# Altium PCB IRLED Board.PcbDoc
Units mil, origin at the board's own origin, x right, y up, seen from the top; angles counter-clockwise.
Board outline 433.07 x 629.92 mil, 2 copper layers (Top Layer, Bottom Layer); 8 components, 4 nets, 19 pads, 3 vias.
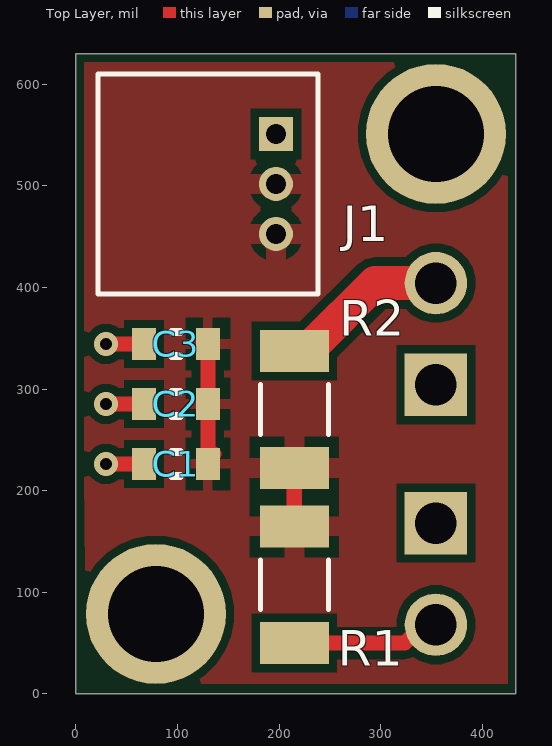
[diagram p0: Top Layer view]
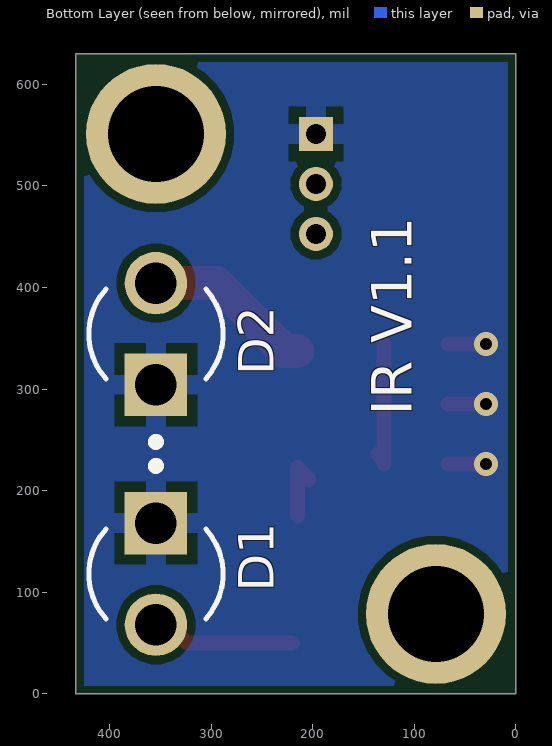
[diagram p1: Bottom Layer view, seen from below]
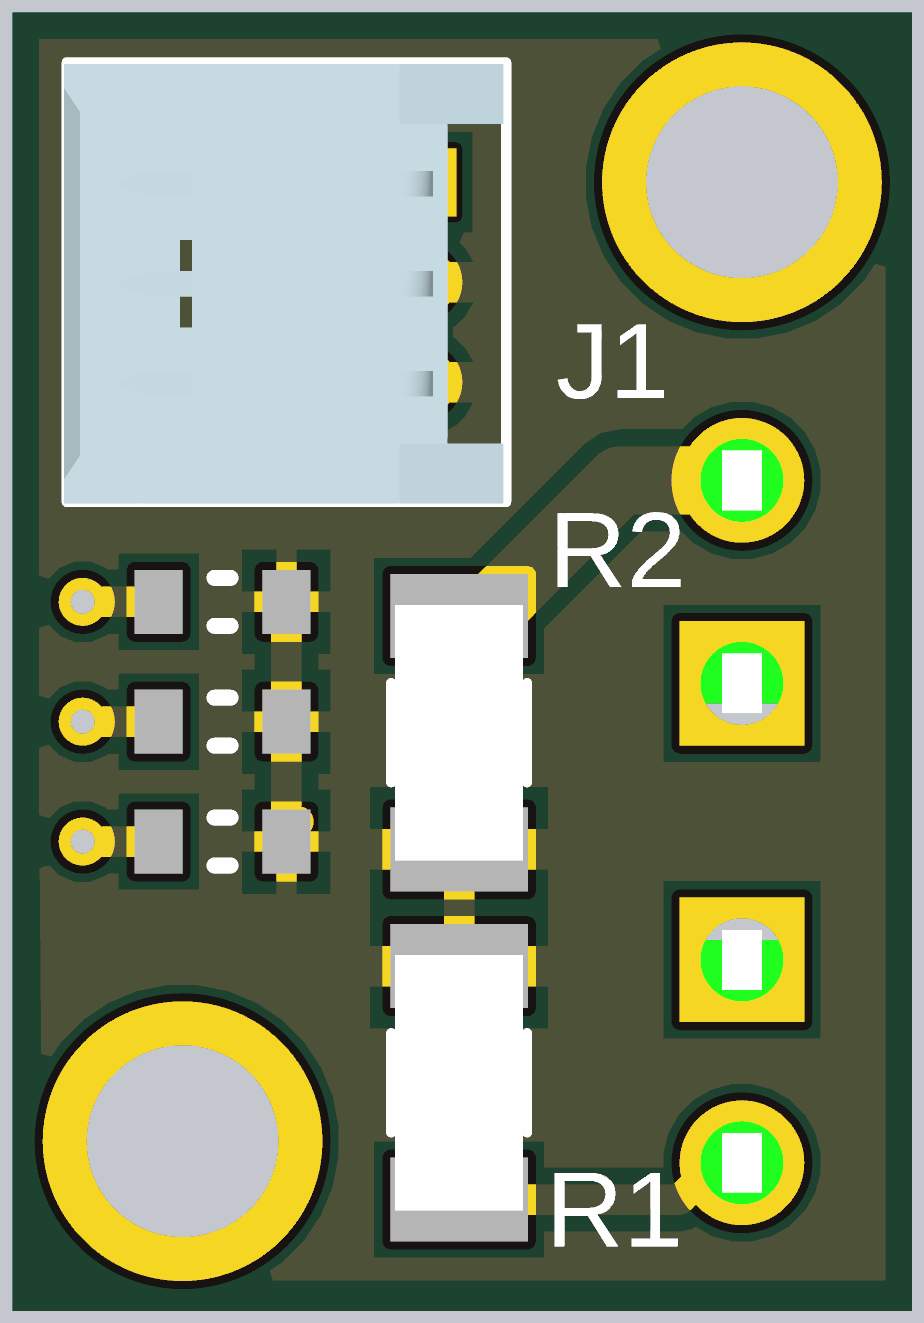
[diagram p2: 3D render of the assembled board from above, using the file's embedded part models]

## Layer stack, top to bottom
Top Solder: solder mask 0.4, Solder Resist, Dk 3.5
Top Layer: signal copper 1.4
Dielectric 1: dielectric 12.6, FR-4, Dk 4.8
Bottom Layer: signal copper 1.4
Bottom Solder: solder mask 0.4, Solder Resist, Dk 3.5

## Board outline
0,0 433.07,0 433.07,629.92 0,629.92

## Design rules (kind name [scope] priority, off if disabled: settings)
BoardOutlineClearance [All] p1: gap=7.87 ignorepadtopadclearanceinfootprint=FALSE except(15.75: Arc-SplitBarrior Arc-SplitContinuation Track-SplitBarrior Track-SplitContinuation SMDPad-SplitBarrior SMDPad-SplitContinuation THPad-SplitBarrior THPad-SplitContinuation Via-SplitBarrior Via-SplitContinuation Fill-SplitBarrior Fill-SplitContinuation Poly-SplitBarrior Poly-SplitContinuation Region-SplitBarrior Region-SplitContinuation Text-SplitBarrior Text-SplitContinuation)
Clearance "Clearance Bottom Layer" [OnLayer('Bottom Layer')] p1: gap=8 ignorepadtopadclearanceinfootprint=TRUE except(10: Arc-Text Track-Text SMDPad-Text THPad-Text Via-Text Fill-Text Poly-Text Region-Text Text-Text)
Clearance "Clearance Top Layer" [OnLayer('Top Layer')] p2: gap=8 ignorepadtopadclearanceinfootprint=TRUE except(10: Arc-Text Track-Text SMDPad-Text THPad-Text Via-Text Fill-Text Poly-Text Region-Text Text-Text)
Clearance [All] p3: gap=7.87 ignorepadtopadclearanceinfootprint=FALSE except(3.5: Arc-Arc Arc-Track Arc-SMDPad Track-Track Track-SMDPad SMDPad-SMDPad; 5: Arc-Via Track-Via SMDPad-Via THPad-Via Via-Via; 10: Arc-Text Track-Text SMDPad-Text THPad-Text Via-Text Fill-Text Poly-Text Region-Text Text-Text)
HoleSize [All] p1: absolutevalues=TRUE maxlimit=248.03 minlimit=7.87 maxpercent=80.000 minpercent=20.000
MinimumAnnularRing [All] p1: minimumring=3
MinimumSolderMaskSliver [All] p1: minsoldermaskwidth=3.94
PolygonConnect [(InNet('3V3') AND InComponent('C1')) or (InNet('3V3') AND InComponent('C2')) or  (InNet('3V3') AND InComponent('C3')) or (InNet('3V3') AND InComponent('C4'))] p1: connectstyle=Relief reliefconductorwidth=10 reliefentries=4 polygonreliefangle="90 Angle" airgapwidth=10
PolygonConnect PolygonConnect_1 [All] p2: thpad.connectstyle=Relief thpad.reliefconductorwidth=20 thpad.reliefentries=4 thpad.polygonreliefangle="90 Angle" thpad.airgapwidth=10 smdpad.connectstyle=Relief smdpad.reliefconductorwidth=20 smdpad.reliefentries=4 smdpad.polygonreliefangle="90 Angle" smdpad.airgapwidth=10 via.connectstyle=Direct via.reliefconductorwidth=20 via.reliefentries=4 via.polygonreliefangle="90 Angle" via.airgapwidth=10
RoutingCorners [All] p1: cornerstyle=Round minsetback=100 maxsetback=100
RoutingVias [All] p1: holewidth=19.68 width=39.37 viastyle="Through Hole" minholewidth=7.87 minwidth=17.72 maxholewidth=39.37 maxwidth=78.74
SilkToSilkClearance [All] p1: silktosilkclearance=3.94
SilkToSolderMaskClearance [IsPad] p1: minsilkscreentomaskgap=3.94 clearancetoexposedcopper=TRUE
SolderMaskExpansion [All] p1: expansion=4 istentingtop=FALSE
Width [All] p1: maxlimit=100 minlimit=3.5 preferedwidth=15
25 further rules are at their usual default settings.

## Components (designator, comment, footprint, x,y, rotation, side; value= is the part's Value field where it differs from the comment)
C1 "10uF" 0603 98.43,226.38 r0 top
C2 "10uF" 0603 98.43,285.43 r0 top
C3 "10uF" 0603 98.43,344.49 r0 top
D1 "TSAL4400" IR940FOOTPRINT 354.33,118.11 r270 bottom
D2 "TSAL4400" IR940FOOTPRINT 354.33,354.33 r90 bottom
J1 "530480310" MOLEX_530480310 196.85,551.18 r270 top
R1 "24" 1206 215,107.52 r270 top
R2 "24" 1206 215,280 r90 top

## Footprints (in the part's own frame and the unit in brackets; to place one, negate y for a bottom-side part, rotate by r counter-clockwise, add the part's x,y. Pads: shape width x height; smd on the part's side, far side on the other; paste and mask are expansions set on the pad)
0603 [mm] "Chip Resistor, 2-Leads, Body 1.60x0.80mm, IPC High Density"
  rect 0.6x0.8 smd mask+0.1: 1(-0.8,0) 2(0.8,0)
  silkscreen extent -0.1,-0.3 0.1,0.3, body extent -0.8,-0.4 0.8,0.4, height 0.6
1206 [mm]
  rect 1.05x1.72 smd: 1(-1.46,0) 2(1.46,0)
  silkscreen extent -0.62,-0.85 0.62,0.85, body extent -1.6,-0.8 1.6,0.8, height 1.61
IR940FOOTPRINT [mm]
  round 1.56 hole 1.04: A(1.27,0)
  rect 1.56x1.56 hole 1.04: C(-1.27,0)
  silkscreen extent -2.8,-1.68 1.12,1.68, body extent -1.65,-1.93 1.91,1.93, height 5.56
MOLEX_530480310 [mm]
  rect 0.85x0.85 / inner round 0.85 / far side rect 0.85x0.85 hole 0.5 mask+0.076: 1(0,0)
  round 0.85 hole 0.5 mask+0.076: 2(1.25,0) 3(2.5,0)
  silkscreen extent -1.5,-4.45 4,1.05, body extent -1.48,-4.48 4.02,1.02, height 3.51

## Part data
C1 C2 C3: library part "CAP 10uF 10V", "Default Symbol for Capacitors", Rating=10V, Tolerance=10%, Part Number="CAP 10uF 10V"
D1 D2: "Infrared Emitter 940nm 36mW/sr Circular Top Mount 2-Pin T-1 Bulk", Package="Radial Vishay", Availability=Unavailable, MF="Vishay Semiconductor", MP=TSAL4400, Part Number=TSAL4400, Price=None, SnapEDA_Link=https://www.snapeda.com/parts/TSAL4400/Vishay%20Semiconductor%20Opto%20Division/view-part/3623381/?ref=snap
J1: library part "HDR 3POS 90deg THRU 1.25mm", Package=None, Availability=Unavailable, MP=530480310, Part Number="HDR 3POS 90deg THRU 1.25mm", Price=None
R1 R2: library part "RES 24 1W - 0.5%", "Default Resistor Symbol", Manufacturer Part Number 1=HRG3216Q-24R0-D-T1, Package=0805, Power (Watts)=0.125W, Supplier Part Number 1=408-1904-1-ND, Tolerance=0.5%, Part Number="RES 24 1W - 0.5%", Supplier 1=Digi-Key, Supplier URL 1=https://www.digikey.ca/en/products/detail/susumu/HRG3216Q-24R0-D-T1/5762559

## Free pads (board coordinates)
  round 137.8 hole 94.49: M2(78.74,78.74) M2(354.33,551.18)

## Via types
v1: diameter 23.62, hole 11.81, Top Layer to Bottom Layer, 3 vias

## Nets (pads, with @x,y where several pads share a name; then routed paths per layer and width w, separated by ;. In a path a pad name is that pad's centre, name@x,y a point inside that pad or via, vN(x,y) a via of type N, cw(c..) or ccw(c..) an arc to the next point about the centre after c; other vN are vias at no path point)
3V3: C1.2 C2.2 C3.2 J1.2 J1.3 R1.1 R2.1 | length 195.1
  Top Layer w15: C1.2 C1.2@129.92,230.32 ; C3.2 C2.2 C1.2@129.92,230.32 ; C1.2@135.83,236.22 C1.2@129.92,230.32 ; J1.2@193.32,498.44 J1.2 ; R2.1@203.58,211.1 R2.1 R1.1@215,175
GND: C1.1 C2.1 C3.1 D1.C D2.C J1.1 | length 112.2
  Top Layer w15: v1(29.53,226.38) C1.1 ; v1(29.53,285.43) C2.1 ; v1(29.53,344.49) C3.1
NetD1_A: D1.A R1.2 | length 141.8
  Top Layer w15: R1.2@220,50 323.66,50 341.77,68.11 D1.A
NetD2_A: D2.A R2.2 | length 167.4
  Top Layer w33.46: R2.2 228.19,337.48 232.13,341.42 232.13,342.13 294.33,404.33 D2.A

## Polygon pours and split planes (outlines as drawn)
GND on Bottom Layer "GND_L02_P000" (solid, pour order 0): 462.6,-29.53 462.6,659.45 452.76,649.61 -29.53,649.61 -29.53,-9.84
3V3 on Top Layer "3V3_L01_P036" (solid, pour order 36): 5,620 10,625 425,625 425,10 10,10

## Silkscreen, mask and mechanical layers (free items; w line width, h text height)
Bottom Overlay:
  text "IR V1.1" at 102.36,273.62 h40 r270
Board Shape:
  the board outline again, w10
Old Board Shape:
  lines w10: 0,0 0,472.44 433.07,472.44

## Dimensions
78.74,78.74 to -98.43,0 on Dimensions
78.74,78.74 to 0,0 on Dimensions
354.33,551.18 to 433.07,629.92 on Dimensions
433.07,629.92 to 354.33,551.18 on Dimensions
433.07,639.76 to 354.33,-49.21 on Dimensions
0,472.44 to 0,0 on Dimensions
0,629.92 to 433.07,629.92 on Dimensions
433.07,629.92 to 433.07,0 on Dimensions